# EAGLE board Led_drvr (EAGLE 4.16)
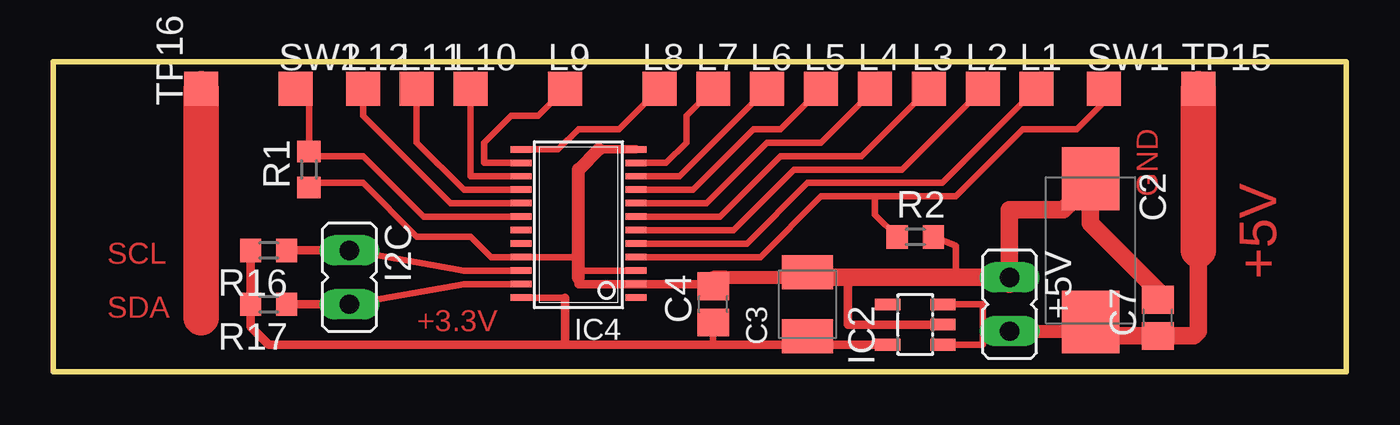
[diagram p0: board, top side]

Size 60.96 x 14.61 mm. Coordinates in mm from the lower left corner, seen from the top.
Outline: 0,0 0,14.61 60.96,14.61 60.96,0 0,0
Copper layers (1*2+15*16): Top 0.035mm / dielectric 0.2mm / Route2 0.035mm / dielectric 0.15mm / Route15 0.035mm / dielectric 0.2mm / Bottom 0.035mm
Design rules "default": minimum track width 10mil, minimum drill 24mil, track to track 8mil, track to pad 8mil, pad to pad 8mil, via to via 8mil, smd to smd 8mil, copper to edge 40mil, drill to drill 8mil, minimum pad ring 10mil, minimum via ring 8mil, stop-mask expansion 4mil, vias tented up to drill 0mil, thermal gap 10mil

## Footprints (pad centres in the part's own frame; a part is rotated, then mirrored left to right if it is on the bottom)
JP1 = drill 0.914 long: 1 0,-1.27; 2 0,1.27
D/7343-31W = smd 2.95 x 2.7: + 3.375,0; - -3.375,0
SMC_B = smd 1.6 x 2.4: + -1.5,0; - 1.5,0
C0805 = smd 1.3 x 1.5: 1 -0.85,0; 2 0.85,0
SOT23-5 = smd 0.55 x 1.2: 1 -0.95,-1.3; 2 0,-1.3; 3 0.95,-1.3; 4 0.95,1.3; 5 -0.95,1.3
TSSOP024 = smd 0.305 x 0.991: 1 -3.493,-2.718; 2 -2.857,-2.718; 3 -2.223,-2.718; 4 -1.587,-2.718; 5 -0.953,-2.718; 6 -0.318,-2.718; 7 0.318,-2.718; 8 0.953,-2.718; 9 1.587,-2.718; 10 2.223,-2.718; 11 2.857,-2.718; 12 3.493,-2.718; 13 3.493,2.718; 14 2.857,2.718; 15 2.223,2.718; 16 1.587,2.718; 17 0.953,2.718; 18 0.318,2.718; 19 -0.318,2.718; 20 -0.953,2.718; 21 -1.587,2.718; 22 -2.223,2.718; 23 -2.857,2.718; 24 -3.493,2.718
TP16SQ = smd 1.6 x 1.6: TP 0,0
R0603 = smd 1 x 1.1: 1 -0.85,0; 2 0.85,0

## Placement (x,y rotation side)
+5V  [JP1]  45.09,3.17 180 top
C2  10u  [D/7343-31W]  48.9,5.71 270 top
C3  10u  [SMC_B]  35.56,3.17 90 top
C4  100n  [C0805]  31.11,3.17 90 top
C7  100n  [C0805]  52.07,2.54 90 top
I2C  [JP1]  13.97,4.45 180 top
IC2  TC10553.3V  [SOT23-5]  40.64,2.22 90 top
IC4  MAX7313  [TSSOP024]  24.77,6.99 90 top
L1  TPTP16SQ  [TP16SQ]  46.35,13.34 0 top
L2  TPTP16SQ  [TP16SQ]  43.81,13.34 0 top
L3  TPTP16SQ  [TP16SQ]  41.27,13.34 0 top
L4  TPTP16SQ  [TP16SQ]  38.73,13.34 0 top
L5  TPTP16SQ  [TP16SQ]  36.2,13.34 0 top
L6  TPTP16SQ  [TP16SQ]  33.66,13.34 0 top
L7  TPTP16SQ  [TP16SQ]  31.11,13.34 0 top
L8  TPTP16SQ  [TP16SQ]  28.57,13.34 0 top
L9  TPTP16SQ  [TP16SQ]  24.13,13.34 0 top
L10  TPTP16SQ  [TP16SQ]  19.68,13.34 0 top
L11  TPTP16SQ  [TP16SQ]  17.14,13.34 0 top
L12  TPTP16SQ  [TP16SQ]  14.61,13.34 0 top
R1  2.2k  [R0603]  12.06,9.53 90 top
R2  2.2k  [R0603]  40.64,6.35 0 top
R16  2.2k  [R0603]  10.16,5.71 180 top
R17  2.2k  [R0603]  10.16,3.17 180 top
SW1  TPTP16SQ  [TP16SQ]  49.53,13.34 0 top
SW2  TPTP16SQ  [TP16SQ]  11.43,13.34 0 top
TP15  TPTP16SQ  [TP16SQ]  53.98,13.34 0 top
TP16  TPTP16SQ  [TP16SQ]  6.99,13.34 90 top

## Library data of the parts
+5V I2C = jumper
C2-C4 C7 R1 R2 R16 R17 = rcl
IC2 IC4 = ZStofer
L1-L12 SW1 SW2 TP15 TP16 = Stofer

## Nets
+5V: +5V.2 C2.+ C7.1 IC2.1 IC2.3 TP15.TP
GND: +5V.1 C2.- C3.- C4.2 C7.2 IC2.2 IC4.2 IC4.3 IC4.12 IC4.21 R1.1 R2.2
N$1: IC4.4 R2.1 SW1.TP
N$2: IC4.5 L1.TP
N$3: IC4.6 L2.TP
N$4: IC4.7 L3.TP
N$5: IC4.8 L4.TP
N$6: IC4.9 L5.TP
N$7: IC4.10 L6.TP
N$8: IC4.11 L7.TP
N$9: IC4.13 L8.TP
N$10: IC4.14 L9.TP
N$11: IC4.15 L10.TP
N$12: IC4.16 L11.TP
N$13: IC4.17 L12.TP
N$14: IC4.18 R1.2 SW2.TP
N$15: C3.+ C4.1 IC2.5 IC4.24 R16.2 R17.2
SCL: I2C.1 IC4.22 R16.1
SDA: I2C.2 IC4.23 R17.1

## Tracks (layer width: path | path; a pad name or v marks a point on that pad's centre or on a via)
+5V
  Top 0.305: IC2.1 43.81,1.27 | 43.81,1.27 | IC2.3 43.81,3.17 43.81,1.91 | 43.81,1.27 43.81,1.91 | 43.81,1.91 +5V.2
  Top 0.61: C2.+ 49.33,1.91 48.9,1.91 +5V.2
  Top 0.813: 53.98,5.71 53.98,1.91 53.76,1.69 C7.1 49.11,1.69 48.9,1.91 C2.+
  Top 1.676: 53.98,5.71 TP15.TP
GND
  Top 0.305: IC4.3 24.77,4.76 24.77,4.45 24.77,5.4 IC4.21 20.64,5.4 19.68,6.35 17.14,6.35 14.61,8.89 12.06,8.89 R1.1 | R2.2 42.55,5.93 42.55,4.45
  Top 0.406: 24.77,4.45 24.77,4.13 IC4.2 31.43,4.13 31.75,4.45 | 25.72,10.48 IC4.12 | IC2.2 37.47,2.22 37.47,4.45 35.56,4.45
  Top 0.61: 25.72,10.48 24.77,9.53 24.77,4.45 | 45.09,4.13 +5V.1 | C4.2 31.11,4.45 31.75,4.45 35.56,4.45 | 48.9,8.89 48.9,7.83
  Top 0.813: 49.53,8.46 C2.- 48.9,8.89 47.62,7.62 45.09,7.62 +5V.1 | C3.- 35.56,4.45 42.55,4.45 44.77,4.45 45.09,4.13 | C7.2 52.07,3.81 48.9,6.99 48.9,7.83
N$1
  Top 0.305: IC4.4 33.34,5.4 36.2,8.26 38.73,8.26 | 38.73,8.26 42.55,8.26 45.72,11.43 48.26,11.43 49.53,12.7 SW1.TP | R2.1 38.73,7.41 38.73,8.26
N$2
  Top 0.305: IC4.5 32.7,6.03 35.56,8.89 41.91,8.89 L1.TP
N$3
  Top 0.305: IC4.6 32.07,6.67 34.92,9.53 40.01,9.53 L2.TP
N$4
  Top 0.305: IC4.7 31.43,7.3 34.29,10.16 38.1,10.16 L3.TP
N$5
  Top 0.305: IC4.8 30.8,7.94 33.66,10.79 36.2,10.79 L4.TP
N$6
  Top 0.305: IC4.9 30.16,8.57 33.02,11.43 34.29,11.43 L5.TP
N$7
  Top 0.305: IC4.10 29.53,9.21 L6.TP
N$8
  Top 0.305: IC4.11 28.89,9.84 29.84,10.79 29.84,12.06 L7.TP
N$9
  Top 0.305: IC4.13 23.81,10.48 24.77,11.43 26.67,11.43 L8.TP
N$10
  Top 0.305: IC4.14 20.32,9.84 20.32,10.79 21.59,12.06 22.86,12.06 L9.TP
N$11
  Top 0.305: IC4.15 19.68,9.21 L10.TP
N$12
  Top 0.305: IC4.16 19.37,8.57 17.14,10.79 L11.TP
N$13
  Top 0.305: IC4.17 18.73,7.94 14.61,12.06 L12.TP
N$14
  Top 0.305: IC4.18 17.46,7.3 14.61,10.16 12.06,10.16 R1.2 12.06,12.7 SW2.TP
N$15
  Top 0.305: 24.13,3.49 IC4.24 | 31.11,1.27 C4.1 | R17.2 9.53,3.17 9.31,3.39
  Top 0.406: 36.2,1.27 31.11,1.27 24.13,1.27 | 36.2,1.27 IC2.5 | 9.31,3.39 R16.2 | R17.2 9.31,2.12 10.16,1.27 24.13,1.27 | 36.2,1.27 35.79,1.68 C3.+ | 24.13,1.27 24.13,3.49
N$16
  Top 1.676: 6.99,2.54 6.99,13.34
SCL
  Top 0.305: IC4.22 19.37,4.76 I2C.1 | R16.1 10.79,5.71
  Top 0.406: R16.1 I2C.1
SDA
  Top 0.305: IC4.23 19.37,4.13 I2C.2 | R17.1 10.79,3.17
  Top 0.406: R17.1 I2C.2

## Text on the board
Top: +5V | GND | SCL | SDA | +3.3V